# Altium PCB DifferentialProbe.PcbDoc (part 2 of 2)
Units mm, origin at the board's own origin, x right, y up, seen from the top; angles counter-clockwise.
Board outline 90 x 33 mm, 4 copper layers (Top Layer, Layer 1, Layer 2, Bottom Layer), stack 1.17 mm thick; 107 components, 44 nets, 239 pads, 207 vias.
Unrouted connection lines stored in the file: 3.
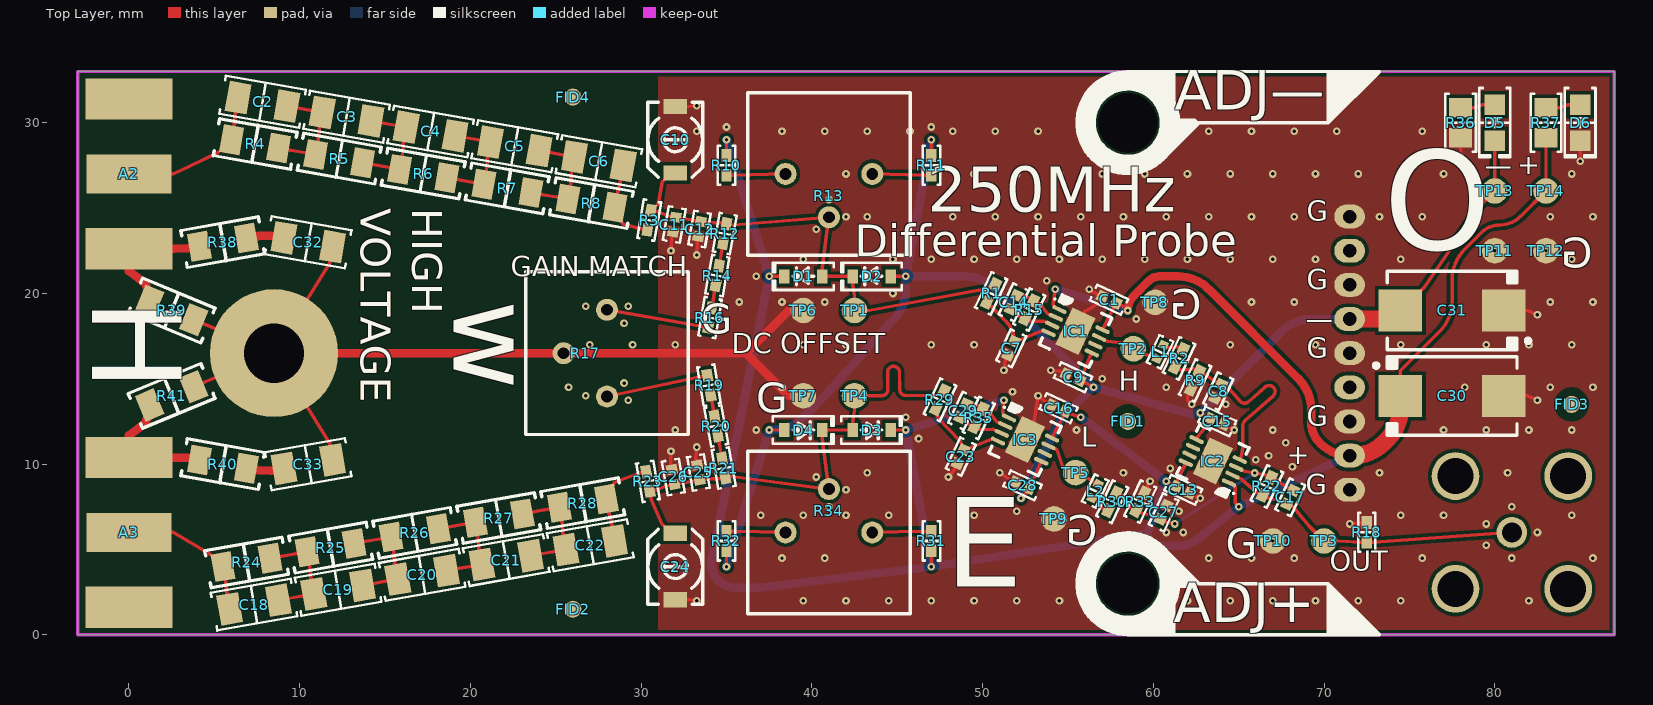
[diagram p0: Top Layer view]

## Via types
v1: diameter 0.45, hole 0.2, Top Layer to Bottom Layer, tented both sides, 207 vias

## Nets (pads, with @x,y where several pads share a name; then routed paths per layer and width w, separated by ;. In a path a pad name is that pad's centre, name@x,y a point inside that pad or via, vN(x,y) a via of type N, cw(c..) or ccw(c..) an arc to the next point about the centre after c; other vN are vias at no path point) (continued)
GND: (continued)
  Top Layer w0.2: R41.1 4.44,14.804 pad.M@8.5,16.5 ; R39.1 4.44,18.196 pad.M@8.5,16.5 ; C33.1 11.754,11.237 pad.M@8.5,16.5 ; C32.1 11.754,21.763 pad.M@8.5,16.5 ; v1(31.75,10.75) 31.731,10.079 C26.1 ; v1(31.75,22.5) 31.8,23.202 C11.1 ; C24.2 32.8,2.05 v1(33.25,2) ; C10.2 32.8,30.95 v1(33.25,31) ; v1(33.25,11) 33.209,10.339 C25.1 ; v1(33.25,22.25) 33.277,22.942 C12.1 ; v1(48,9.25) 48.359,9.682 C23.1 ; v1(51,9.5) 51.578,9.108 C28.2 ; v1(51.25,15.5) 51.317,16.026 C7.1 ; IC3.9 53.03,12.601 v1(53.25,14) 53.691,13.639 C16.1 ; v1(53.997,15.495) cw(c54.027,15.297) 54.044,15.496 54.536,15.452 C9.2 ; IC1.9 55.989,18.945 56.834,19.434 C1.1 56.649,19.983 56.263,20.241 56.262,20.242 cw(c56.374,20.408) 56.258,20.245 v1(56.25,20.251) ; R33.2 59.525,8.422 59.678,8.75 cw(c59.859,8.665) 59.691,8.773 59.829,8.986 cw(c59.929,9.16) v1(59.811,8.998) ; C27.2 61.166,7.397 v1(61.5,7.25) ; C13.1 62.511,8.145 v1(62.75,8) ; R9.2 62.004,13.953 62.004,13.746 v1(62.25,13.5) ; C8.2 64.002,13.694 v1(64.25,13.5) ; C15.2 64.511,12.145 v1(64.75,12) ; v1(71.5,6.5) 72.1,6.575 R18.1 ; v1(78,28) R36.2 ; C30.2 81.9,14 v1(82.5,13.75) ; C31.1 81.9,19 v1(82.5,18.75) ; v1(85,27.75) 85,28.25 D6.2
  Top Layer w0.5: pad.M@8.5,16.5 R17.2 36.15,16.5 ; v1(39.5,14) 38.65,14 36.15,16.5 ; v1(39.5,19) 38.65,19 36.15,16.5
  other v1: 39.5,2 42,2 44.5,2 47,2 49.5,2 52,2 54.5,2 62,2 64.5,2 67,2 69.5,2 72,2 74.5,2 82,2 38.25,4.5 40.75,4.5 63.25,4.5 65.75,4.5 68.25,4.5 75.75,4.5 81,4.5 85.75,4.5 79.5,5.25 67,5.5 60.75,6 61.75,6 82.5,6 79.5,6.5 54.182,6.79 37,7 39.5,7 42,7 44.5,7 49.5,7 74.5,7 77,7 84.5,7 52,7.25 41,7.5 81,7.5 42,8.5 40.25,9.25 43.25,9.5 58.25,9.5 73.25,9.5 80.75,9.5 61,9.75 68.15,9.85 66,10.25 66.75,10.5 67.75,11.25 46.25,11.5 32,12 36.75,12 55.5,12 67,12 77,12 79.5,12 82,12 84.5,12 45.5,12.75 29.25,13.75 26.75,14 51.75,14.25 25.75,14.5 38.25,14.5 60.75,14.5 78.25,14.5 83.25,14.5 85.75,14.5 29,14.75 57,15 27,17 29.5,17 32,17 39.5,17 42,17 47,17 49.5,17 64.5,17 69.5,17 74.5,17 79.5,17 82,17 84.5,17 29,18.25 59,18.5 26.75,19.25 29.25,19.25 60.099,19.478 35.75,19.5 38.25,19.5 40.75,19.5 65.75,19.5 68.25,19.5 83.25,19.5 85.75,19.5 44.75,20 53.75,20.75 36.75,21 39.5,22 44.75,22 47,22 49.5,22 52,22 54.5,22 57,22 59.5,22 62,22 64.5,22 67,22 69.5,22 74.5,22 84.5,22 80,22.5 83,22.5 40.25,23.75 42,24.5 43.25,24.5 48.25,24.5 50.75,24.5 53.25,24.5 55.75,24.5 58.25,24.5 60.75,24.5 63.25,24.5 65.75,24.5 68.25,24.5 73.25,24.5 75.75,24.5 83.25,24.5 85.75,24.5 41,25.5 42,27 49.5,27 52,27 54.5,27 57,27 59.5,27 62,27 64.5,27 67,27 69.5,27 72,27 74.5,27 77,27 84.5,27 33.25,29.5 38.25,29.5 40.75,29.5 43.25,29.5 45.75,29.5 48.25,29.5 50.75,29.5 53.25,29.5 55.75,29.5 63.25,29.5 65.75,29.5 68.25,29.5 70.75,29.5 75.75,29.5 35,29.75 47,29.75
IN_N: A3.S C18.1 R24.1 | length 8.7
  Top Layer w0.2: A3.S 2.6,6 4.697,4.763 5.474,4.219 R24.1 5.673,3.087 5.724,2.512 C18.1
IN_P: A2.S C2.1 R4.1 | length 9.2
  Top Layer w0.2: A2.S 2.6,27 5.197,28.237 5.974,28.781 R4.1 6.173,29.913 6.224,30.488 C2.1
LED_4V8: D6.1 R37.1 | length 2
  Top Layer w0.2: R37.1 83.775,30.875 84.3,31.05 D6.1
LED_-4V8: D5.1 R36.1 | length 2
  Top Layer w0.2: R36.1 78.775,30.875 79.3,31.05 D5.1
NetA2_G: A2.G R38.2 R39.2 | length 7.8
  Top Layer w0.5: R39.2 1.293,19.744 0.93,20.62 0,21.31 0,22.617 2.64,22.617 3.432,22.635 R38.2
NetA3_G: A3.G R40.2 R41.2 | length 7.8
  Top Layer w0.5: R41.2 1.293,13.256 0.93,12.38 0,11.691 0,10.383 2.64,10.383 3.432,10.365 R40.2
NetC2_2: C2.2 C3.1 R4.2 R5.1 | length 6.8
  Top Layer w0.2: R4.2 9.46,28.395 10.247,28.256 R5.1 11.097,29.045 11.148,29.62 C3.1 10.583,30.735 9.992,30.839 C2.2
NetC3_2: C3.2 C4.1 R5.2 R6.1 | length 6.8
  Top Layer w0.2: R5.2 14.384,27.526 15.171,27.387 R6.1 16.021,28.177 16.072,28.752 C4.1 15.507,29.867 14.916,29.971 C3.2
NetC4_2: C4.2 C5.1 R6.2 R7.1 | length 6.8
  Top Layer w0.2: R6.2 19.308,26.658 20.095,26.519 R7.1 20.945,27.309 20.996,27.884 C5.1 20.431,28.999 19.84,29.103 C4.2
NetC5_2: C5.2 C6.1 R7.2 R8.1 | length 6.8
  Top Layer w0.2: R7.2 24.232,25.79 25.02,25.651 R8.1 25.87,26.44 25.92,27.015 C6.1 25.355,28.13 24.764,28.235 C5.2
NetC6_2: C6.2 R3.1 R8.2 | length 5.1
  Top Layer w0.2: C6.2 28.776,26.512 28.627,25.954 R8.2 28.427,24.822 28.971,24.045 29.975,23.793 R3.1
NetC7_2: C7.2 IC1.4 R1.2 | length 5
  Top Layer w0.2: R1.2 51.369,18.367 cw(c50.188,17.186) C7.2 51.876,17.178 52.369,17.357 53.36,17.755 53.572,17.832 IC1.4
NetC8_1: C8.1 IC2.4 R2.2 R9.1 | length 12
  Top Layer w0.2: R2.2 61.631,15.504 62.329,15.594 R9.1 63.054,15.256 63.613,14.847 C8.1 64.374,14.492 65.016,13.764 65.083,13.69 ccw(c65.345,13.921) 65.577,13.659 66.551,14.52 cw(c66.783,14.257) 67.045,14.489 cw(c66.783,14.257) 67.014,13.995 65.368,12.541 ccw(c65.6,12.279) 65.25,12.279 65.25,11.017 65.247,10.984 65.207,10.741 65.18,10.584 65.161,10.47 IC2.4
NetC10_1: C10.1 C11.2 C12.2 D1.1 D2.2 R1.1 R3.2 R12.2 R13.2 TP1.1 | length 29.2
  Top Layer w0.2: C10.1 31.75,27.05 31.229,26.529 31.011,25.231 30.581,24.93 R3.2 30.962,24.787 31.609,24.536 C11.2 32.436,24.39 33.086,24.275 C12.2 33.913,24.13 34.606,24.144 R12.2 35.394,24.006 R13.2 40.612,21.515 D1.1 D2.2 42.387,20.485 42.5,19.85 TP1.1 43.35,19 50.219,20.274 50.711,20.453 R1.1
NetC14_1: C14.1 IC1.3 R15.1 | length 2.7
  Top Layer w0.2: C14.1 52.017,18.899 52.123,18.701 R15.1 52.848,18.363 53.579,18.381 IC1.3
NetC17_1: C17.1 C27.1 IC2.3 R22.1 R30.2 R33.1 | length 13.3
  Top Layer w0.2: R30.2 58.196,8.155 58.634,7.458 R33.1 59.359,7.12 60.033,6.955 C27.1 60.794,6.6 v1(61.25,6.5) ; IC2.3 65.353,9.58 v1(65.945,9.483) 66.537,9.387 R22.1 67.262,9.049 67.822,8.639 C17.1
  Bottom Layer w0.2: v1(61.25,6.5) 64.376,8.503 ccw(c64.269,8.672) 64.419,8.54 cw(c64.75,8.25) 64.611,8.667 64.641,8.677 ccw(c64.578,8.867) 64.683,8.697 v1(65.945,9.483)
NetC18_2: C18.2 C19.1 R24.2 R25.1 | length 6.8
  Top Layer w0.2: R24.2 8.96,4.605 9.747,4.744 R25.1 10.597,3.955 10.648,3.38 C19.1 10.083,2.265 9.492,2.161 C18.2
NetC19_2: C19.2 C20.1 R25.2 R26.1 | length 6.8
  Top Layer w0.2: R25.2 13.884,5.474 14.671,5.613 R26.1 15.521,4.823 15.572,4.248 C20.1 15.007,3.133 14.416,3.029 C19.2
NetC20_2: C20.2 C21.1 R26.2 R27.1 | length 6.8
  Top Layer w0.2: R26.2 18.808,6.342 19.595,6.481 R27.1 20.445,5.691 20.496,5.116 C21.1 19.931,4.001 19.34,3.897 C20.2
NetC21_2: C21.2 C22.1 R27.2 R28.1 | length 6.8
  Top Layer w0.2: R27.2 23.732,7.21 24.52,7.349 R28.1 25.37,6.56 25.42,5.985 C22.1 24.855,4.87 24.264,4.765 C21.2
NetC22_2: C22.2 R23.1 R28.2 | length 5.6
  Top Layer w0.2: C22.2 28.276,6.488 28.127,7.046 R28.2 27.927,8.178 28.471,8.955 29.906,9.488 R23.1
NetC23_2: C23.2 IC3.4 R29.2 | length 5.2
  Top Layer w0.2: R29.2 47.23,13.176 47.409,12.684 48.702,11.343 48.882,10.85 C23.2 48.918,10.833 49.411,11.013 50.402,11.411 50.613,11.488 IC3.4
NetC24_1: C24.1 C25.2 C26.2 D3.1 D4.2 R21.2 R23.2 R29.1 R34.2 TP4.1 | length 29.2
  Top Layer w0.2: C24.1 31.75,5.95 31.229,6.471 30.582,7.957 R23.2 30.894,8.494 31.54,8.745 C26.2 32.367,8.891 33.017,9.006 C25.2 33.845,9.152 34.538,9.137 R21.2 35.326,9.276 R34.2 40.612,11.485 D4.2 D3.1 42.387,12.515 42.5,13.15 TP4.1 43.35,14 44,14.007 44.1,14.008 ccw(c44.096,14.358) 44.446,14.361 44.436,15.379 cw(c44.786,15.382) 44.782,15.732 cw(c44.786,15.382) 45.136,15.386 45.146,14.368 ccw(c45.496,14.372) 45.5,14.022 46.761,14.035 46.861,14.036 47.223,14.039 47.716,14.219 R29.1
NetC29_1: C29.1 IC3.3 R35.1 | length 2.7
  Top Layer w0.2: C29.1 49.059,12.555 49.165,12.357 R35.1 49.89,12.019 50.621,12.036 IC3.3
NetC32_2: C32.2 R38.1 | length 2.2
  Top Layer w0.5: R38.1 7.568,23.365 8.333,23.382 C32.2
NetC33_2: C33.2 R40.1 | length 2.2
  Top Layer w0.5: R40.1 7.568,9.635 8.333,9.618 C33.2
NetL1_2: L1.2 R2.1 | length 1.2
  Top Layer w0.2: L1.2 60.923,16.821 61.392,16.885 R2.1
NetL2_2: L2.2 R30.1 | length 1.2
  Top Layer w0.2: L2.2 56.748,7.866 56.985,7.45 R30.1
NetR10_2: R10.2 R13.1 | length 3.5
  Top Layer w0.2: R10.2 35.4,26.925 R13.1
NetR11_1: R11.1 R13.3 | length 3.5
  Top Layer w0.2: R13.3 46.6,26.925 R11.1
NetR12_1: R12.1 R14.2 | length 1.3
  Top Layer w0.2: R14.2 34.648,22.081 34.718,22.475 R12.1
NetR14_1: R14.1 R16.2 | length 1.3
  Top Layer w0.2: R16.2 34.214,19.619 34.284,20.013 R14.1
NetR16_1: R16.1 R17.1 | length 6
  Top Layer w0.2: R17.1 33.538,18.088 R16.1
NetR17_3: R17.3 R19.1 | length 6
  Top Layer w0.2: R17.3 33.483,15.12 R19.1
NetR19_2: R19.2 R20.1 | length 1.3
  Top Layer w0.2: R19.2 34.159,13.589 34.215,13.269 R20.1
NetR20_2: R20.2 R21.1 | length 1.3
  Top Layer w0.2: R20.2 34.58,11.201 34.649,10.807 R21.1
NetR31_2: R31.2 R34.1 | length 3.5
  Top Layer w0.2: R34.1 46.6,6.075 R31.2
NetR32_1: R32.1 R34.3 | length 3.5
  Top Layer w0.2: R32.1 35.4,6.075 R34.3
VOUT: A1.S C17.2 IC2.2 IC2.7 R18.2 R22.2 TP3.1 | length 17.8
  Top Layer w0.2: IC2.2 65.142,9.127 66.051,8.344 R22.2 66.776,8.006 67.45,7.841 C17.2 68.211,7.486 69.15,6.35 TP3.1 70.85,5.5 72.1,5.425 R18.2 72.9,5.425 A1.S
pads on no net: A1.G FID1.F FID2.F FID3.F FID4.F IC1.6 IC2.6 IC3.6 J1.2 J1.6

## Polygon pours and split planes (outlines as drawn)
GND on Bottom Layer "GND_L04_P001" (solid, remove dead copper, pour order 1): 87,0 31,0 31,33 87,33
GND on Top Layer "GND_L01_P000" (solid, remove dead copper, pour order 0): 87,33 87,0 31,0 31,33 33,33
GND on Layer 2 (split plane): 86.49,0.51 31,0.51 31,13 24,13 24,20 31,20 31,32.49 86.49,32.49
GND on Layer 1 (split plane): 86.49,0.51 31,0.51 31,13 24,13 24,20 31,20 31,32.49 86.49,32.49

## Keep-outs
Keep-Out Layer:
  the board outline again, w0.2

## Other copper
Layer 1 (plane layer: these items are gaps in the copper):
  region: -3,0 31,0 31,13 24,13 24,20 31,20 31,33 -3,33
Layer 2 (plane layer: these items are gaps in the copper):
  region: -3,0 31,0 31,13 24,13 24,20 31,20 31,33 -3,33

## Silkscreen, mask and mechanical layers (free items; w line width, h text height)
Top Overlay:
  circle w1.2: c58.5,30 r2.475
  circle w1.2: c58.5,3 r2.475
  region: 70.25,30 70.25,33 73.25,33
  region: 70.25,3 70.25,0 73.25,0
  region: 62.7,30 61.075,28.375 61.025,28.375 61.025,29.925 61.325,30.225 62.45,30.225
  region: 61.275,31.275 61.275,33.025 59.15,33.025
  region: 61.275,1.725 61.275,-0.025 59.15,-0.025
  region: 62.7,3 61.075,4.625 61.025,4.625 61.025,3.075 61.325,2.775 62.45,2.775
  lines w0.2: 58.5,0 70.25,0 ; 58.5,33 70.25,33 ; 60.475,5.225 62.7,3 70.25,3 ; 60.475,27.775 62.7,30 70.25,30 ; 70.25,0 73.25,0 70.25,3 ; 70.25,0 70.25,3 ; 70.25,3 70.25,3 ; 70.25,30 73.25,33 70.25,33 ; 70.25,30 70.25,33
  text "ADJ—" at 61.25,30 h4
  text "+" at 81.326,26.613 h2
  text "—" at 79.424,26.546 h2
  text "HIGH / VOLTAGE" at 13,24.977 h3 r270
  text "250MHz" at 46.78,23.913 h4.5
  text "G" at 68.989,23.863 h2
  text "Differential Probe" at 42.5,21.575 h3.2
  text "G" at 85.749,20.911 h3
  text "O" at 73.488,20.65 h10
  text "GAIN MATCH" at 22.375,20.615 h2
  text "G" at 68.989,19.863 h2
  text "H" at -3.878,19.694 h9 r270
  text "w" at 17.49,19.599 h8 r270
  text "G" at 62.848,17.889 h3
  text "—" at 68.924,17.546 h2
  text "G" at 33.495,17.048 h3
  text "DC OFFSET" at 35.32,16.113 h2
  text "G" at 68.989,15.863 h2
  text "H" at 57.983,13.911 h2
  text "G" at 36.751,12.411 h3
  text "G" at 68.989,11.863 h2
  text "L" at 55.788,10.634 h2
  text "+" at 67.826,9.613 h2
  text "G" at 68.924,7.863 h2
  text "G" at 56.749,4.661 h3
  text "G" at 64.251,3.911 h3
  text "OUT" at 70.326,3.363 h2
  text "E" at 47.806,1.09 h9
  text "ADJ+" at 61.184,-0.015 h4